# Altium PCB DoorCardController.PcbDoc (part 1 of 2)
Units mm, origin at the board's own origin, x right, y up, seen from the top; angles counter-clockwise.
Board outline 87 x 117.3 mm, 2 copper layers (Top Layer, Bottom Layer); 141 components, 112 nets, 420 pads, 246 vias.
Unrouted connection lines stored in the file: 29.
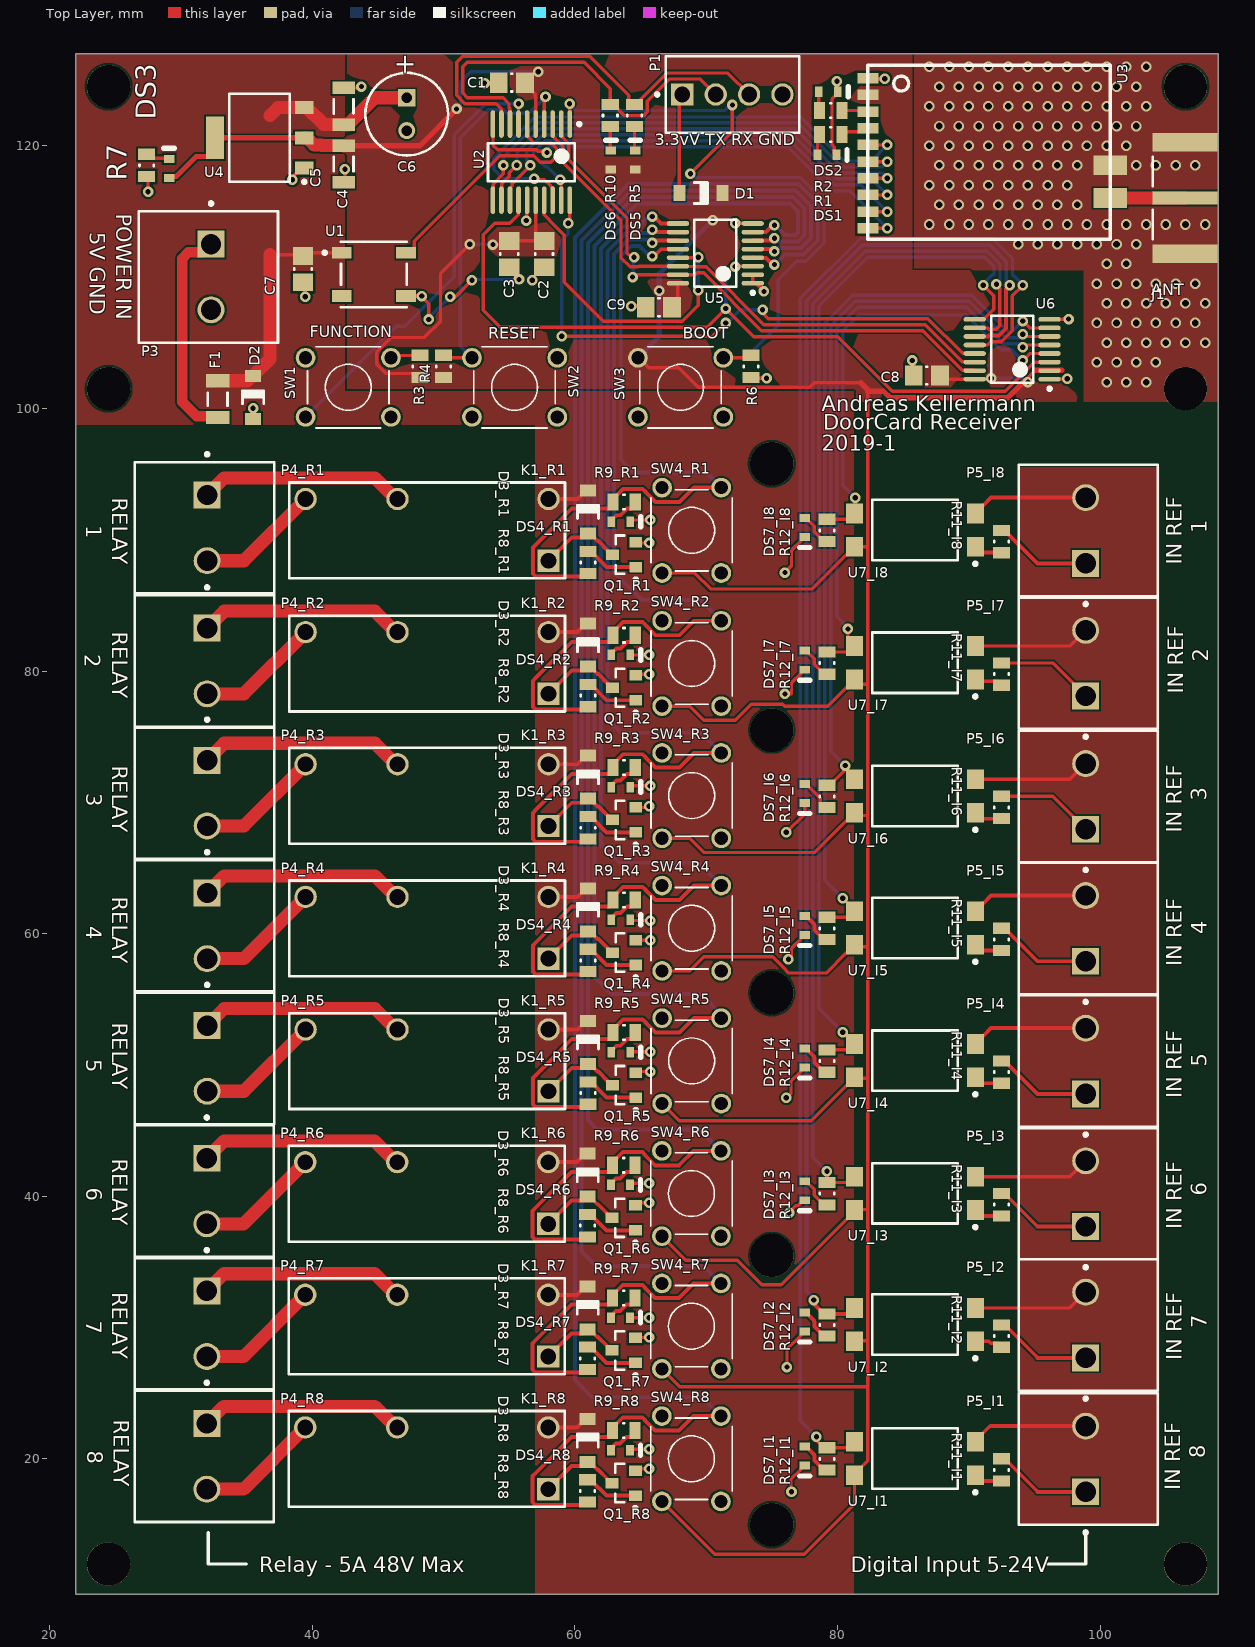
[diagram p0: Top Layer view]
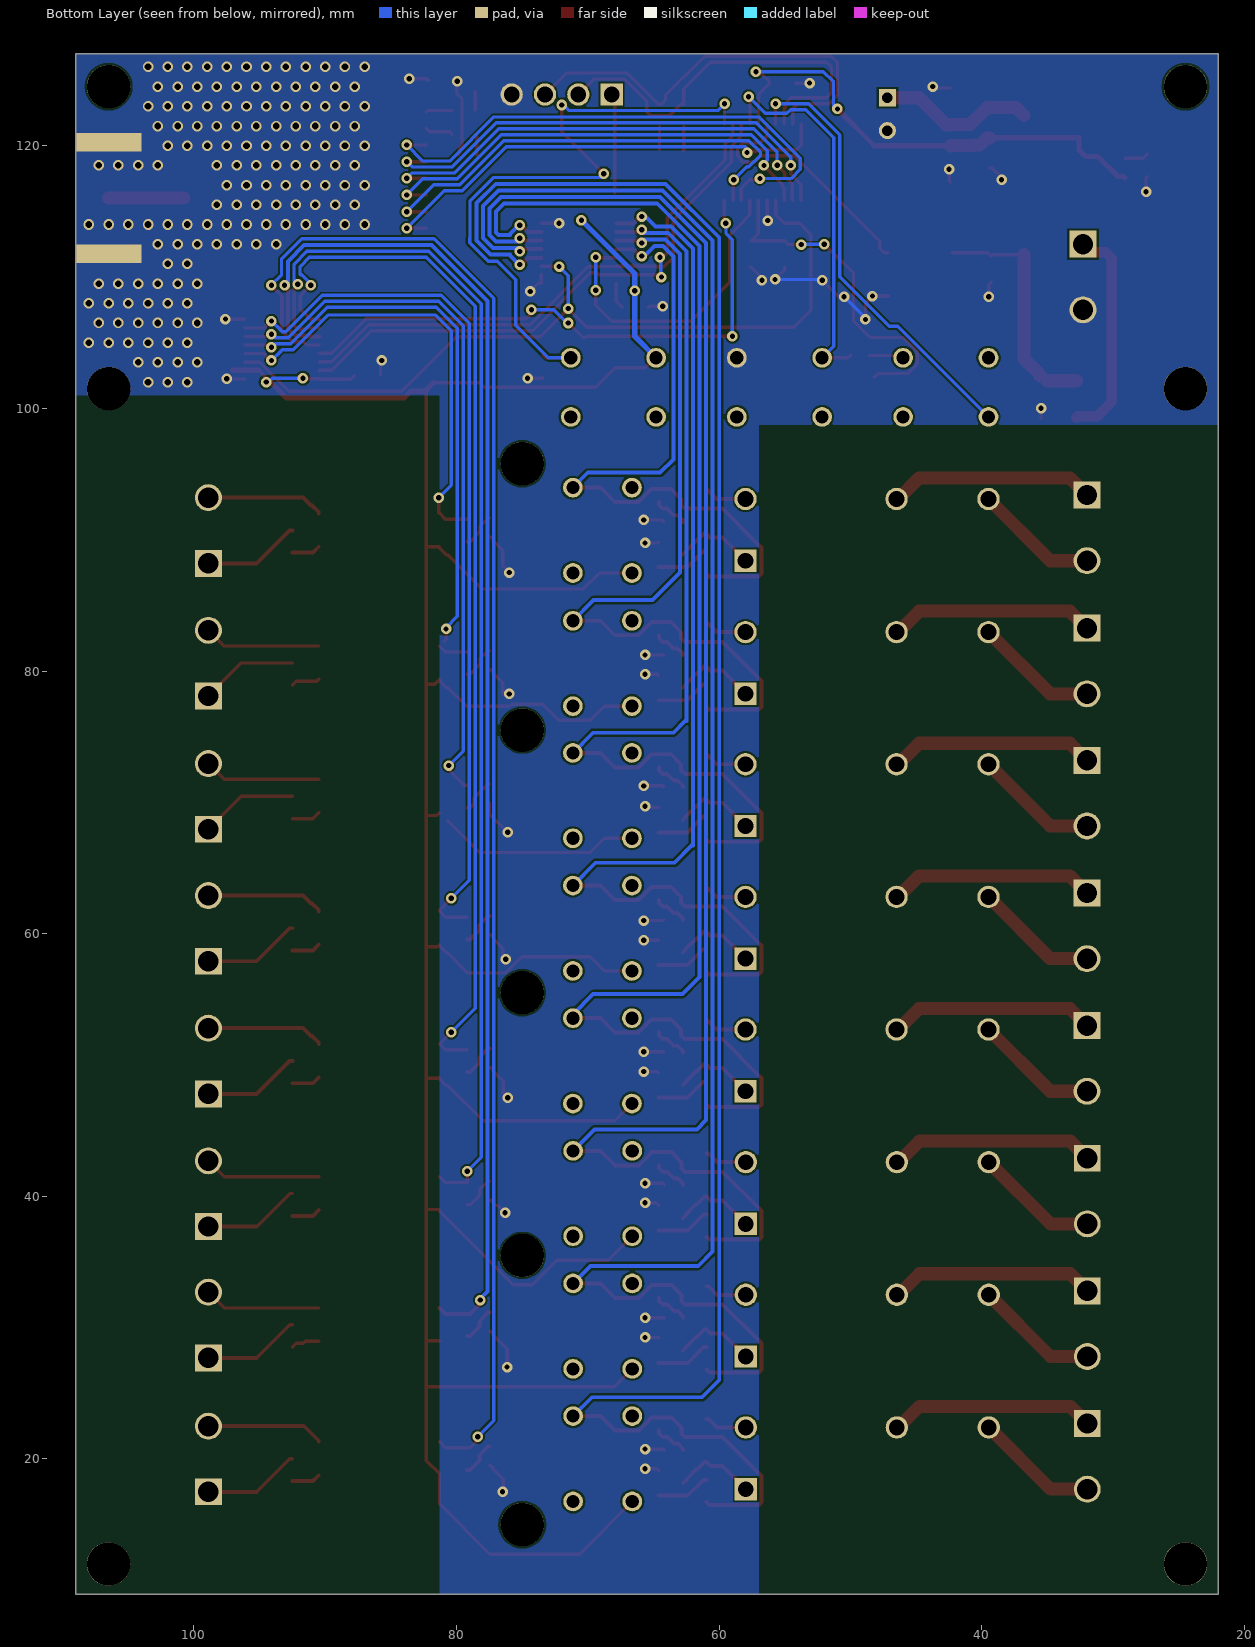
[diagram p1: Bottom Layer view, seen from below]

## Layer stack, top to bottom
Top Solder: solder mask 0.0102, Solder Resist, Dk 3.5
Top Layer: signal copper 0.0356
Dielectric 1: dielectric 0.32, FR-4, Dk 4.8
Bottom Layer: signal copper 0.0356
Bottom Solder: solder mask 0.0102, Solder Resist, Dk 3.5

## Board outline
22,9.7 109,9.7 109,127 22,127

## Design rules (kind name [scope] priority, off if disabled: settings)
Clearance [All] p1: gap=0.16 ignorepadtopadclearanceinfootprint=FALSE
PlaneConnect [All] p1: planeconnectstyle=Direct reliefexpansion=0.508 reliefentries=4 reliefconductorwidth=0.254 reliefairgap=0.254
PolygonConnect [All] p1: connectstyle=Direct reliefconductorwidth=0.254 reliefentries=4 polygonreliefangle="90 Angle" airgapwidth=0.254
RoomDefinition I8 [InComponentClass('I8')] p1: confinementstyle=ConfineIn formatcopy=TRUE lockcomponents=FALSE outline 73.9,85.66 104.4,85.66 104.4,95.86 73.9,95.86
RoomDefinition I7 [InComponentClass('I7')] p2: confinementstyle=ConfineIn formatcopy=TRUE lockcomponents=FALSE outline 73.9,75.56 104.4,75.56 104.4,85.76 73.9,85.76
RoomDefinition I6 [InComponentClass('I6')] p3: confinementstyle=ConfineIn formatcopy=TRUE lockcomponents=FALSE outline 73.9,65.41 104.4,65.41 104.4,75.61 73.9,75.61
RoomDefinition I5 [InComponentClass('I5')] p4: confinementstyle=ConfineIn formatcopy=TRUE lockcomponents=FALSE outline 73.9,55.36 104.4,55.36 104.4,65.56 73.9,65.56
RoomDefinition I4 [InComponentClass('I4')] p5: confinementstyle=ConfineIn formatcopy=TRUE lockcomponents=FALSE outline 73.9,45.26 104.4,45.26 104.4,55.46 73.9,55.46
RoomDefinition I3 [InComponentClass('I3')] p6: confinementstyle=ConfineIn formatcopy=TRUE lockcomponents=FALSE outline 73.9,35.16 104.4,35.16 104.4,45.36 73.9,45.36
RoomDefinition I1 [InComponentClass('I1')] p7: confinementstyle=ConfineIn formatcopy=TRUE lockcomponents=FALSE outline 73.9,14.96 104.4,14.96 104.4,25.16 73.9,25.16
RoomDefinition R1 [InComponentClass('R1')] p8: confinementstyle=ConfineIn formatcopy=TRUE lockcomponents=FALSE outline 26.5,85.9 72.2,85.9 72.2,95.9 26.5,95.9
RoomDefinition R8 [InComponentClass('R8')] p9: confinementstyle=ConfineIn formatcopy=TRUE lockcomponents=FALSE outline 26.477,15.2 72.177,15.2 72.177,25.2 26.477,25.2
RoomDefinition R7 [InComponentClass('R7')] p10: confinementstyle=ConfineIn formatcopy=TRUE lockcomponents=FALSE outline 26.477,25.3 72.177,25.3 72.177,35.3 26.477,35.3
RoomDefinition R6 [InComponentClass('R6')] p11: confinementstyle=ConfineIn formatcopy=TRUE lockcomponents=FALSE outline 26.477,35.4 72.177,35.4 72.177,45.4 26.477,45.4
RoomDefinition R5 [InComponentClass('R5')] p12: confinementstyle=ConfineIn formatcopy=TRUE lockcomponents=FALSE outline 26.5,45.5 72.2,45.5 72.2,55.5 26.5,55.5
RoomDefinition R4 [InComponentClass('R4')] p13: confinementstyle=ConfineIn formatcopy=TRUE lockcomponents=FALSE outline 26.5,55.6 72.2,55.6 72.2,65.6 26.5,65.6
RoomDefinition I2 [InComponentClass('I2')] p14: confinementstyle=ConfineIn formatcopy=TRUE lockcomponents=FALSE outline 73.9,25.16 104.4,25.16 104.4,35.36 73.9,35.36
RoomDefinition R3 [InComponentClass('R3')] p15: confinementstyle=ConfineIn formatcopy=TRUE lockcomponents=FALSE outline 26.5,65.7 72.2,65.7 72.2,75.7 26.5,75.7
RoomDefinition R2 [InComponentClass('R2')] p16: confinementstyle=ConfineIn formatcopy=TRUE lockcomponents=FALSE outline 26.5,75.763 72.2,75.763 72.2,85.763 26.5,85.763
RoutingVias [All] p1: holewidth=0.4 width=0.7 viastyle="Through Hole" minholewidth=0.4 minwidth=0.7 maxholewidth=1 maxwidth=2
SolderMaskExpansion [All] p1: expansion=0.102
Width [All] p1: maxlimit=10 minlimit=0.254 preferedwidth=0.254
29 further rules are at their usual default settings.

## Classes and differential pairs
component class I7: DS7_I7 P5_I7 R11_I7 R12_I7 U7_I7
component class I6: DS7_I6 P5_I6 R11_I6 R12_I6 U7_I6
component class I5: DS7_I5 P5_I5 R11_I5 R12_I5 U7_I5
component class I4: DS7_I4 P5_I4 R11_I4 R12_I4 U7_I4
component class I3: P5_I3 R11_I3 U7_I3
component class I2: DS7_I2 P5_I2 R11_I2 R12_I2 U7_I2
component class I1: DS7_I1 P5_I1 R11_I1 R12_I1 U7_I1
channel class isolatedInput: I1 I2 I3 I4 I5 I6 I7 I8
component class R8: D3_R8 DS4_R8 K1_R8 P4_R8 Q1_R8 R8_R8 R9_R8 SW4_R8
component class R7: D3_R7 DS4_R7 K1_R7 P4_R7 Q1_R7 R8_R7 R9_R7 SW4_R7
component class R6: D3_R6 DS4_R6 K1_R6 P4_R6 Q1_R6 R8_R6 R9_R6 SW4_R6
component class Designator: C4 C5 C6 D2 F1 P3 U4
component class I8: DS7_I8 P5_I8 R11_I8 R12_I8 U7_I8
channel class Relay: R1 R2 R3 R4 R5 R6 R7 R8
component class R5: D3_R5 DS4_R5 K1_R5 P4_R5 Q1_R5 R8_R5 R9_R5 SW4_R5
component class R4: D3_R4 DS4_R4 K1_R4 P4_R4 Q1_R4 R8_R4 R9_R4 SW4_R4
component class R3: D3_R3 DS4_R3 K1_R3 P4_R3 Q1_R3 R8_R3 R9_R3 SW4_R3
component class R2: D3_R2 DS4_R2 K1_R2 P4_R2 Q1_R2 R8_R2 R9_R2 SW4_R2
component class R1: D3_R1 DS4_R1 K1_R1 P4_R1 Q1_R1 R8_R1 R9_R1 SW4_R1
component class DoorCard_ReceiverController: C1 C2 C3 C7 C8 C9 D1 DS1 DS2 DS3 DS5 DS6 J1 R1 R2 R3 R4 R5 R6 R7 R10 SW1 SW2 SW3 U1 U2 U3 U5 U6

## Components (designator, comment, footprint, x,y, rotation, side; value= is the part's Value field where it differs from the comment)
C1 "1uF" CAPC0805(2012)100_M 55.2,124.8 r0 top
C2 "1uF" CAPC0805(2012)100_M 57.665,111.75 r90 top
C3 "1uF" CAPC0805(2012)100_M 55.011,111.75 r90 top
C4 "10uF" CAPC1206(3216)130_L 42.4,123 r270 top
C5 "10uF" CAPC1206(3216)130_L 42.4,118.6 r90 top
C6 "ECA-1HM470" PNSC-ECA-1HM470 47.2,122.4 r270 top
C7 "1uF" CAPC0805(2012)100_M 39.3,110.6 r90 top
C8 "1uF" CAPC0805(2012)100_M 86.8,102.5 r0 top
C9 "1uF" CAPC0805(2012)100_M 66.4,107.7 r0 top
D1 "MMSD4148T3G" ONSC-SOD123-2-425G-04_V 69.6,116.4 r180 top
D2 "MMSD4148T3G" ONSC-SOD123-2-425G-04_V 35.5,100.837 r270 top
D3_R1 "MMSD4148T3G" ONSC-SOD123-2-425G-04_V 61,92.113 r270 top (schematic designator D3)
D3_R2 "MMSD4148T3G" ONSC-SOD123-2-425G-04_V 61,81.975 r270 top (schematic designator D3)
D3_R3 "MMSD4148T3G" ONSC-SOD123-2-425G-04_V 61,71.913 r270 top (schematic designator D3)
D3_R4 "MMSD4148T3G" ONSC-SOD123-2-425G-04_V 61,61.813 r270 top (schematic designator D3)
D3_R5 "MMSD4148T3G" ONSC-SOD123-2-425G-04_V 61,51.713 r270 top (schematic designator D3)
D3_R6 "MMSD4148T3G" ONSC-SOD123-2-425G-04_V 60.977,41.612 r270 top (schematic designator D3)
D3_R7 "MMSD4148T3G" ONSC-SOD123-2-425G-04_V 60.977,31.512 r270 top (schematic designator D3)
D3_R8 "MMSD4148T3G" ONSC-SOD123-2-425G-04_V 60.977,21.412 r270 top (schematic designator D3)
DS1 "TLMS1100-GS08" VISH-TLMX1100_V 79.2,119.3 r0 top
DS2 "TLMS1100-GS08" VISH-TLMX1100_V 79.3,124.1 r0 top
DS3 "TLMS1100-GS08" VISH-TLMX1100_V 29.1,118.275 r90 top
DS4_R1 "TLMS1100-GS08" VISH-TLMX1100_V 63.5,91.362 r0 top (schematic designator DS4)
DS4_R2 "TLMS1100-GS08" VISH-TLMX1100_V 63.5,81.225 r0 top (schematic designator DS4)
DS4_R3 "TLMS1100-GS08" VISH-TLMX1100_V 63.5,71.162 r0 top (schematic designator DS4)
DS4_R4 "TLMS1100-GS08" VISH-TLMX1100_V 63.5,61.062 r0 top (schematic designator DS4)
DS4_R5 "TLMS1100-GS08" VISH-TLMX1100_V 63.5,50.962 r0 top (schematic designator DS4)
DS4_R6 "TLMS1100-GS08" VISH-TLMX1100_V 63.477,40.862 r0 top (schematic designator DS4)
DS4_R7 "TLMS1100-GS08" VISH-TLMX1100_V 63.477,30.762 r0 top (schematic designator DS4)
DS4_R8 "TLMS1100-GS08" VISH-TLMX1100_V 63.477,20.662 r0 top (schematic designator DS4)
DS5 "TLMS1100-GS08" VISH-TLMX1100_V 64.6,118.9 r90 top
DS6 "TLMS1100-GS08" VISH-TLMX1100_V 62.75,118.9 r90 top
DS7_I1 "TLMS1100-GS08" VISH-TLMX1100_V 77.5,20.225 r270 top (schematic designator DS7)
DS7_I2 "TLMS1100-GS08" VISH-TLMX1100_V 77.5,30.425 r270 top (schematic designator DS7)
DS7_I3 "TLMS1100-GS08" VISH-TLMX1100_V 77.5,40.425 r270 top (schematic designator DS7)
DS7_I4 "TLMS1100-GS08" VISH-TLMX1100_V 77.5,50.525 r270 top (schematic designator DS7)
DS7_I5 "TLMS1100-GS08" VISH-TLMX1100_V 77.5,60.625 r270 top (schematic designator DS7)
DS7_I6 "TLMS1100-GS08" VISH-TLMX1100_V 77.5,70.675 r270 top (schematic designator DS7)
DS7_I7 "TLMS1100-GS08" VISH-TLMX1100_V 77.5,80.825 r270 top (schematic designator DS7)
DS7_I8 "TLMS1100-GS08" VISH-TLMX1100_V 77.5,90.925 r270 top (schematic designator DS7)
F1 "1206L012WR" LFUS-1206L012WR_V 32.8,100.7 r270 top
J1 "32K145-400L5" ROS-32K145-400L5_V 109,116.017 r270 top
K1_R1 "ALDP105W" PNSC-LD-P-4-2050x720x1530_V 58,88.4 r180 top (schematic designator K1)
K1_R2 "ALDP105W" PNSC-LD-P-4-2050x720x1530_V 58,78.263 r180 top (schematic designator K1)
K1_R3 "ALDP105W" PNSC-LD-P-4-2050x720x1530_V 58,68.2 r180 top (schematic designator K1)
K1_R4 "ALDP105W" PNSC-LD-P-4-2050x720x1530_V 58,58.1 r180 top (schematic designator K1)
K1_R5 "ALDP105W" PNSC-LD-P-4-2050x720x1530_V 58,48 r180 top (schematic designator K1)
K1_R6 "ALDP105W" PNSC-LD-P-4-2050x720x1530_V 57.977,37.9 r180 top (schematic designator K1)
K1_R7 "ALDP105W" PNSC-LD-P-4-2050x720x1530_V 57.977,27.8 r180 top (schematic designator K1)
K1_R8 "ALDP105W" PNSC-LD-P-4-2050x720x1530_V 57.977,17.7 r180 top (schematic designator K1)
P1 "22-27-2041" MOLX-22-27-2041_V 72,123.9 r180 top
P3 "SCREW-5.0/5.08 2WAYS" SCREW-5.0-2WAYS_V 32.3,110 r270 top
P4_R1 "SCREW-5.0/5.08 2WAYS" SCREW-5.0-2WAYS_V 32,90.9 r270 top (schematic designator P4)
P4_R2 "SCREW-5.0/5.08 2WAYS" SCREW-5.0-2WAYS_V 32,80.763 r270 top (schematic designator P4)
P4_R3 "SCREW-5.0/5.08 2WAYS" SCREW-5.0-2WAYS_V 32,70.7 r270 top (schematic designator P4)
P4_R4 "SCREW-5.0/5.08 2WAYS" SCREW-5.0-2WAYS_V 32,60.6 r270 top (schematic designator P4)
P4_R5 "SCREW-5.0/5.08 2WAYS" SCREW-5.0-2WAYS_V 32,50.5 r270 top (schematic designator P4)
P4_R6 "SCREW-5.0/5.08 2WAYS" SCREW-5.0-2WAYS_V 31.977,40.4 r270 top (schematic designator P4)
P4_R7 "SCREW-5.0/5.08 2WAYS" SCREW-5.0-2WAYS_V 31.977,30.3 r270 top (schematic designator P4)
P4_R8 "SCREW-5.0/5.08 2WAYS" SCREW-5.0-2WAYS_V 31.977,20.2 r270 top (schematic designator P4)
P5_I1 "SCREW-5.0/5.08 2WAYS" SCREW-5.0-2WAYS_V 98.9,20 r90 top (schematic designator P5)
P5_I2 "SCREW-5.0/5.08 2WAYS" SCREW-5.0-2WAYS_V 98.9,30.2 r90 top (schematic designator P5)
P5_I3 "SCREW-5.0/5.08 2WAYS" SCREW-5.0-2WAYS_V 98.9,40.2 r90 top (schematic designator P5)
P5_I4 "SCREW-5.0/5.08 2WAYS" SCREW-5.0-2WAYS_V 98.9,50.3 r90 top (schematic designator P5)
P5_I5 "SCREW-5.0/5.08 2WAYS" SCREW-5.0-2WAYS_V 98.9,60.4 r90 top (schematic designator P5)
P5_I6 "SCREW-5.0/5.08 2WAYS" SCREW-5.0-2WAYS_V 98.9,70.45 r90 top (schematic designator P5)
P5_I7 "SCREW-5.0/5.08 2WAYS" SCREW-5.0-2WAYS_V 98.9,80.6 r90 top (schematic designator P5)
P5_I8 "SCREW-5.0/5.08 2WAYS" SCREW-5.0-2WAYS_V 98.9,90.7 r90 top (schematic designator P5)
Q1_R1 "A12" INTR-SOT-23-3_V 63.75,88.862 r90 top (schematic designator Q1)
Q1_R2 "A12" INTR-SOT-23-3_V 63.75,78.725 r90 top (schematic designator Q1)
Q1_R3 "A12" INTR-SOT-23-3_V 63.75,68.663 r90 top (schematic designator Q1)
Q1_R4 "A12" INTR-SOT-23-3_V 63.75,58.562 r90 top (schematic designator Q1)
Q1_R5 "A12" INTR-SOT-23-3_V 63.75,48.462 r90 top (schematic designator Q1)
Q1_R6 "A12" INTR-SOT-23-3_V 63.727,38.363 r90 top (schematic designator Q1)
Q1_R7 "A12" INTR-SOT-23-3_V 63.727,28.263 r90 top (schematic designator Q1)
Q1_R8 "A12" INTR-SOT-23-3_V 63.727,18.162 r90 top (schematic designator Q1)
R1 "330" RESC0805(2012)_L 79.488,120.85 r180 top value="10200.00 Ohm"
R2 "330" RESC0805(2012)_L 79.488,122.675 r180 top value="10200.00 Ohm"
R3 "10k" RESC0805(2012)_L 48.2,103.2 r270 top value="10200.00 Ohm"
R4 "10k" RESC0805(2012)_L 50,103.2 r270 top value="10200.00 Ohm"
R5 "330" RESC0805(2012)_L 64.55,122.3 r270 top value="10200.00 Ohm"
R6 "10k" RESC0805(2012)_L 73.417,103.2 r90 top value="10200.00 Ohm"
R7 "10k" RESC0805(2012)_L 27.4,118.5 r90 top value="10200.00 Ohm"
R8_R1 "10k" RESC0805(2012)_L 61,88.263 r270 top value="10200.00 Ohm" (schematic designator R8)
R8_R2 "10k" RESC0805(2012)_L 61,78.125 r270 top value="10200.00 Ohm" (schematic designator R8)
R8_R3 "10k" RESC0805(2012)_L 61,68.063 r270 top value="10200.00 Ohm" (schematic designator R8)
R8_R4 "10k" RESC0805(2012)_L 61,57.963 r270 top value="10200.00 Ohm" (schematic designator R8)
R8_R5 "10k" RESC0805(2012)_L 61,47.863 r270 top value="10200.00 Ohm" (schematic designator R8)
R8_R6 "10k" RESC0805(2012)_L 60.977,37.763 r270 top value="10200.00 Ohm" (schematic designator R8)
R8_R7 "10k" RESC0805(2012)_L 60.977,27.663 r270 top value="10200.00 Ohm" (schematic designator R8)
R8_R8 "10k" RESC0805(2012)_L 60.977,17.563 r270 top value="10200.00 Ohm" (schematic designator R8)
R9_R1 "330" RESC0805(2012)_L 63.75,92.863 r0 top value="10200.00 Ohm" (schematic designator R9)
R9_R2 "330" RESC0805(2012)_L 63.75,82.725 r0 top value="10200.00 Ohm" (schematic designator R9)
R9_R3 "330" RESC0805(2012)_L 63.75,72.663 r0 top value="10200.00 Ohm" (schematic designator R9)
R9_R4 "330" RESC0805(2012)_L 63.75,62.563 r0 top value="10200.00 Ohm" (schematic designator R9)
R9_R5 "330" RESC0805(2012)_L 63.75,52.463 r0 top value="10200.00 Ohm" (schematic designator R9)
R9_R6 "330" RESC0805(2012)_L 63.727,42.363 r0 top value="10200.00 Ohm" (schematic designator R9)
R9_R7 "330" RESC0805(2012)_L 63.727,32.263 r0 top value="10200.00 Ohm" (schematic designator R9)
R9_R8 "330" RESC0805(2012)_L 63.727,22.163 r0 top value="10200.00 Ohm" (schematic designator R9)
R10 "330" RESC0805(2012)_L 62.7,122.3 r270 top value="10200.00 Ohm"
R11_I1 "2k" RESC0805(2012)_L 92.5,19.16 r270 top value="10200.00 Ohm" (schematic designator R11)
R11_I2 "2k" RESC0805(2012)_L 92.5,29.36 r270 top value="10200.00 Ohm" (schematic designator R11)
R11_I3 "2k" RESC0805(2012)_L 92.5,39.36 r270 top value="10200.00 Ohm" (schematic designator R11)
R11_I4 "2k" RESC0805(2012)_L 92.5,49.46 r270 top value="10200.00 Ohm" (schematic designator R11)
R11_I5 "2k" RESC0805(2012)_L 92.5,59.56 r270 top value="10200.00 Ohm" (schematic designator R11)
R11_I6 "2k" RESC0805(2012)_L 92.5,69.61 r270 top value="10200.00 Ohm" (schematic designator R11)
R11_I7 "2k" RESC0805(2012)_L 92.5,79.76 r270 top value="10200.00 Ohm" (schematic designator R11)
R11_I8 "2k" RESC0805(2012)_L 92.5,89.86 r270 top value="10200.00 Ohm" (schematic designator R11)
R12_I1 "2k" RESC0805(2012)_L 79.2,20 r270 top value="10200.00 Ohm" (schematic designator R12)
R12_I2 "2k" RESC0805(2012)_L 79.2,30.2 r270 top value="10200.00 Ohm" (schematic designator R12)
R12_I3 "2k" RESC0805(2012)_L 79.2,40.2 r270 top value="10200.00 Ohm" (schematic designator R12)
R12_I4 "2k" RESC0805(2012)_L 79.2,50.3 r270 top value="10200.00 Ohm" (schematic designator R12)
R12_I5 "2k" RESC0805(2012)_L 79.2,60.4 r270 top value="10200.00 Ohm" (schematic designator R12)
R12_I6 "2k" RESC0805(2012)_L 79.2,70.45 r270 top value="10200.00 Ohm" (schematic designator R12)
R12_I7 "2k" RESC0805(2012)_L 79.2,80.6 r270 top value="10200.00 Ohm" (schematic designator R12)
R12_I8 "2k" RESC0805(2012)_L 79.2,90.7 r270 top value="10200.00 Ohm" (schematic designator R12)
SW1 "430156070736" 430156070736 42.75,101.6 r0 top locked
SW2 "430156070736" 430156070736 55.415,101.6 r0 top locked
SW3 "430156070736" 430156070736 68.055,101.6 r0 top locked
SW4_R1 "430156070736" 430156070736 68.9,90.713 r90 top (schematic designator SW4)
SW4_R2 "430156070736" 430156070736 68.9,80.575 r90 top (schematic designator SW4)
SW4_R3 "430156070736" 430156070736 68.9,70.513 r90 top (schematic designator SW4)
SW4_R4 "430156070736" 430156070736 68.9,60.413 r90 top (schematic designator SW4)
SW4_R5 "430156070736" 430156070736 68.9,50.313 r90 top (schematic designator SW4)
SW4_R6 "430156070736" 430156070736 68.877,40.213 r90 top (schematic designator SW4)
SW4_R7 "430156070736" 430156070736 68.877,30.113 r90 top (schematic designator SW4)
SW4_R8 "430156070736" 430156070736 68.877,20.012 r90 top (schematic designator SW4)
U1 "WS2812B" ADAI-WS2812B_V 44.7,110.2 r0 top
U2 "STM32F070F6P6" STM-TSSOP20_M 56.69,118.75 r270 top locked
U3 "Si4463" E10-433MS 82.312,113.707 r0 top
U4 "LT1117CST-3.3#TRPBF" LT-ST-3-SOT-223_N 36,120.6 r180 top
U5 "PCA9538PW" PW16_N 70.7,111.8 r180 top
U6 "PCA9538PW" PW16_N 93.3,104.5 r180 top
U7_I1 "FOD817DSD" FAIR-MDIP-4_V 85.9,20.03 r180 top (schematic designator U7)
U7_I2 "FOD817DSD" FAIR-MDIP-4_V 85.9,30.23 r180 top (schematic designator U7)
U7_I3 "FOD817DSD" FAIR-MDIP-4_V 85.9,40.23 r180 top (schematic designator U7)
U7_I4 "FOD817DSD" FAIR-MDIP-4_V 85.9,50.33 r180 top (schematic designator U7)
U7_I5 "FOD817DSD" FAIR-MDIP-4_V 85.9,60.43 r180 top (schematic designator U7)
U7_I6 "FOD817DSD" FAIR-MDIP-4_V 85.9,70.48 r180 top (schematic designator U7)
U7_I7 "FOD817DSD" FAIR-MDIP-4_V 85.9,80.63 r180 top (schematic designator U7)
U7_I8 "FOD817DSD" FAIR-MDIP-4_V 85.9,90.73 r180 top (schematic designator U7)

## Footprints (in the part's own frame and the unit in brackets; to place one, negate y for a bottom-side part, rotate by r counter-clockwise, add the part's x,y. Pads: shape width x height; smd on the part's side, far side on the other; paste and mask are expansions set on the pad)
430156070736 [mm] "6*6mm vertical type, THT, height 7.0mm, salmon actuator, 360gf, Bulk"
  round 1.5 hole 1: 1(-3.25,2.25) 2(-3.25,-2.25) 3(3.25,2.25) 4(3.25,-2.25)
  silkscreen extent -3.1,-3.1 3.1,3.1, body extent -3.95,-3.1 3.95,3.1, height 7.01
ADAI-WS2812B_V [mm] "SMD, 4-Leads, Body 5x5mm, Pitch 3.3mm"
  rect 1.5x0.9 smd: 1(-2.45,1.65) 2(-2.45,-1.65) 3(2.45,-1.65) 4(2.45,1.65)
  silkscreen extent -3.87,-2.5 2.5,2.5, body extent -2.7,-2.5 2.7,2.5, height 1.69
CAPC0805(2012)100_M [mm] "Chip Capacitor, Body 2.0x1.2mm, Height 1.0mm, IPC Low Density"
  rect 1.35x1.55 smd: 1(-1,0) 2(1,0)
  silkscreen extent -0.05,-0.67 0.05,0.67, body extent -1.1,-0.72 1.1,0.72, height 1
CAPC1206(3216)130_L [mm] "Chip Capacitor, Body 3.2x1.6mm, Height 1.3mm, IPC High Density"
  rect 0.95x1.7 smd: 1(-1.4,0) 2(1.4,0)
  silkscreen extent -0.55,-0.75 0.55,0.75, body extent -1.7,-0.9 1.7,0.9, height 1.3
E10-433MS [mm] "Si4463"
  rect 1.6x0.8 smd: 1(0,11.43) 2(0,10.16) 3(0,8.89) 4(0,7.62) 5(0,6.35) 6(0,5.08) 7(0,3.81) 8(0,2.54) 9(0,1.27) 10(0,0)
  rect 2.54x1.5 smd: 11(18.45,2.31) 12(18.45,4.8)
  silkscreen extent 0,-0.84 18.45,12.43
FAIR-MDIP-4_V [mm] "SMD, 4-Leads, Body 6.5x4.6mm, Pitch 2.54mm"
  rect 1.3x1.5 smd: 1(-4.6,1.27) 2(-4.6,-1.27) 3(4.6,-1.27) 4(4.6,1.27)
  silkscreen extent -4.73,-2.3 3.25,2.69, body extent -5.08,-2.3 5.08,2.3, height 3.85
INTR-SOT-23-3_V [mm] "SOT23, 3-Leads, Body 2.92x1.3mm, Pitch 1.9mm"
  rect 0.802x0.972 smd: 1(-0.95,-0.885) 2(0.95,-0.885) 3(0,0.885)
  silkscreen extent -2.03,-1.01 1.46,0.64, body extent -1.46,-0.65 1.46,0.65, height 1.12
LFUS-1206L012WR_V [mm] "SMD, 2-Leads, Body 3.2x1.65mm"
  rect 1x1.8 smd: 1(-1.4,0) 2(1.4,0)
  silkscreen extent -0.5,-0.75 0.5,0.75, body extent -1.6,-0.82 1.6,0.82, height 1.45
LT-ST-3-SOT-223_N [mm] "SOT223, 4-Leads, Body 6.505x3.505mm, Pitch 2.3mm, IPC Medium Density"
  rect 1.4x1 smd: 1(-3.4,2.3) 2(-3.4,0) 3(-3.4,-2.3)
  rect 1.4x3.25 smd: 4(3.4,0)
  silkscreen extent -3.53,-3.35 2.3,3.47, body extent -1.86,-3.35 1.86,3.35, height 1.8
MOLX-22-27-2041_V [mm] "CONN, 4-Leads, Body 10.16x5.8mm, Pitch 2.54mm"
  rect 1.7x1.7 hole 1.19: 1(3.81,0)
  round 1.7 hole 1.19: 2(1.27,0) 3(-1.27,0) 4(-3.81,0)
  silkscreen extent -5.08,-2.9 5.85,2.9, body extent -5.08,-2.9 5.08,2.9, height 11.7
ONSC-SOD123-2-425G-04_V [mm] "SOD123, 2-Leads, Body 2.69x1.6mm, Height 1.35mm"
  rect 0.915x1.22 smd: 1(-1.637,0) 2(1.637,0)
  silkscreen extent -0.5,-0.8 0.5,0.8, body extent -1.35,-0.8 1.35,0.8, height 1.35
PNSC-ECA-1HM470 [mm]
  rect 1.3x1.3 hole 0.8: 1(-1.25,0)
  round 1.3 hole 0.8: 2(1.25,0)
  silkscreen extent -3.15,-3.15 3.15,3.15, body extent -3.15,-3.15 3.15,3.15, height 12.2
PNSC-LD-P-4-2050x720x1530_V [mm] "LD-P, 4-Leads, Body 20.5x7.2mm"
  rect 1.7x1.7 hole 1.2 mask+0.102: 1(0,0)
  round 1.7 hole 1.2 mask+0.102: 2(18.5,-4.7) 3(11.5,-4.7) 4(0,-4.7)
  silkscreen extent -1.25,-5.95 19.75,1.35, body extent -1.05,-5.85 19.45,1.35, height 15.3
PW16_N [mm] "TSOP, 16-Leads, Body 5x4.4mm, Pitch 0.65mm, IPC Medium Density"
  oval 1.7x0.35 smd: 1(-2.85,2.275) 2(-2.85,1.625) 3(-2.85,0.975) 4(-2.85,0.325) 5(-2.85,-0.325) 6(-2.85,-0.975) 7(-2.85,-1.625) 8(-2.85,-2.275) 9(2.85,-2.275) 10(2.85,-1.625) 11(2.85,-0.975) 12(2.85,-0.325) 13(2.85,0.325) 14(2.85,0.975) 15(2.85,1.625) 16(2.85,2.275)
  silkscreen extent -2.98,-2.55 1.6,3.12, body extent -2.25,-2.55 2.25,2.55, height 1.2
RESC0805(2012)_L [mm] "Chip Resistor, Body 2.0x1.3mm, IPC High Density"
  rect 0.85x1.3 smd: 1(-0.85,0) 2(0.85,0)
  silkscreen extent -0.05,-0.55 0.05,0.55, body extent -1.1,-0.67 1.1,0.68, height 0.7
ROS-32K145-400L5_V [mm] "SMA Right Angle Jack, Edge Mount, 14.25x9.5x4.46mm, Rosenberger Recommended"
  rect 1x5 smd: 1(0,-2.5)
  rect 1.4x5 smd: MP(-4.25,-2.5) MP(4.25,-2.5)
  rect 1.4x5 smd far side paste-2: MP(-4.25,-2.5) MP(4.25,-2.5)
  silkscreen extent -3.15,-5 3.15,-5, body extent -4.75,-4.75 4.75,9.5, height 4.2
SCREW-5.0-2WAYS_V [mm] "Socket, Screw Terminal Block, 2-Leads, Pitch 5mm, 90 Degree Angle, Through-Hole"
  rect 2.05x2.05 hole 1.55: 1(-2.5,0)
  round 2.05 hole 1.55: 2(2.5,0)
  silkscreen extent -5.72,-5.5 5,5.1, body extent -5,-5.5 5.02,5.1, height 18.2
STM-TSSOP20_M [mm] "SOP, 20-Leads, Body 6.6x4.5mm, Pitch 0.65mm, IPC Low Density"
  oval 2.1x0.35 smd: 1(-2.9,2.925) 2(-2.9,2.275) 3(-2.9,1.625) 4(-2.9,0.975) 5(-2.9,0.325) 6(-2.9,-0.325) 7(-2.9,-0.975) 8(-2.9,-1.625) 9(-2.9,-2.275) 10(-2.9,-2.925) 11(2.9,-2.925) 12(2.9,-2.275) 13(2.9,-1.625) 14(2.9,-0.975) 15(2.9,-0.325) 16(2.9,0.325) 17(2.9,0.975) 18(2.9,1.625) 19(2.9,2.275) 20(2.9,2.925)
  silkscreen extent -3.02,-3.3 1.45,3.78, body extent -2.25,-3.3 2.25,3.3, height 1.2
VISH-TLMX1100_V [mm] "SMD, 2-Leads, Body 1.6x0.8mm"
  rect 0.6x0.8 smd: 1(-0.725,0) 2(0.725,0)
  silkscreen extent 1.53,-0.4 1.53,0.4, body extent -0.8,-0.4 0.8,0.4, height 0.65

## Part data
C1 C2 C3 C7 C8 C9: library part CMP-1036-04754-1, "CAP 1uF 25V ±10% 0805 (2012 Metric) Thickness 1mm SMD", Case-EIA=0805, Case-Metric=2012, Rated Voltage="25 V", Tolerance=±10%, Max Thickness="1 mm", Technology=SMT
C4 C5: library part CMP-1037-04970-1, Case-EIA=1206, Case-Metric=3216, Rated Voltage="10 V", Tolerance="-20% to +80%", Max Thickness="1.3 mm", Technology=SMT
C6: library part CMP-1665-00013-1, "CAP ALUM 47UF 50V 20% RADIAL", ComponentLink1Description=Datasheet, ComponentLink1URL=http://industrial.panasonic.com/cdbs/www-data/pdf/RDF0000/ABA0000C1047.pdf, PackageReference=ECA-1HM470, PartNumber=ECA-1HM470
D1 D2 D3_R1 D3_R2 D3_R3 D3_R4 D3_R5 D3_R6 D3_R7 D3_R8: library part CMP-0895-00002-1, "Switching Diode, 100 V, 200 mA, -55 to 150 degC, 2-Pin SOD123 (425), RoHS, Tape and Reel", Manufacturer="ON Semiconductor", Temperature Range="-55 to 150 degC", CD (Max)="4 pF", ComponentLink1Description="Manufacturer URL", ComponentLink1URL=http://www.onsemi.com/, ComponentLink2Description=Datasheet, ComponentLink2URL=http://www.onsemi.com/pub_link/Collateral/MMSD4148T1-D.PDF, ComponentLink3Description="Package Specification", ComponentLink3URL=http://www.onsemi.com/pub_link/Collateral/425-04.PDF, DatasheetVersion="Rev. 11", IR @ VR="75 V (Max)=50 uA", Mounting Technology="Surface Mount", PackageDescription="2-Pin SOD123, Body 2.69 x 1.6 mm, Height 1.35 mm", PackageReference=SOD123-2-425G-04, PackageVersion="Rev. 04G", Packing="Tape and Reel", PartNumber=MMSD4148T3G, PD (Max)="425 mW", RoHS=TRUE, Trr (Max)="4 ns", VBR (Min)="100 V", VF (Max)="1 A"
DS1 DS2 DS3 DS4_R1 DS4_R2 DS4_R3 DS4_R4 DS4_R5 DS4_R6 DS4_R7 DS4_R8 DS5 DS6 DS7_I1 DS7_I2 DS7_I3 DS7_I4 DS7_I5 DS7_I6 DS7_I7 DS7_I8: library part CMP-1666-00027-1, "LED, RED, 2.1 V, -40 to 100 degC, 2-Pin SMD (0603), RoHS, Tape and Reel", Capacitance="12 pF", Case/Package=0603, Case Code (Metric)=1608, Max Operating Temperature=125degC, Min Operating Temperature=-55degC, Package Quantity=4000, Resistance="100000000000 Ohm", Tolerance=5%, Type (Capacitors)=C0G, Voltage Rating="50 V", Case Code (Imperial)=0603, ComponentLink1Description="Manufacturer URL", ComponentLink1URL=http://www.vishay.com/, ComponentLink2Description=Datasheet, ComponentLink2URL=http://www.vishay.com/docs/83173/tlmb1100.pdf, DatasheetVersion="Rev. 2.7, 03/2016", Height="0.8 mm", Length="1.6 mm", Mount="Surface Mount", PackageDescription="2-Pin Surface Mount Device, Body 1.6 x 0.8 mm", PackageReference=TLMX1100, Packaging="Tape and Reel", Pins=2, Radiation Hardening=No, REACH SVHC="No SVHC", RoHSCompliant=True, Voltage Rating (DC)="50 V", Width="0.8 mm"
F1: library part CMP-2000-05470-1, "POLY-FUSE(R) Resettable PTC, 30 V, -40 to 85 degC, 2-Pin SMD, RoHS, Tape and Reel", Hold Current [Ih]=0.125A, Manufacturer=Littelfuse, Operating Temp Range=-40to+85°C, Package Description="2-Pin Surface Mount Device, Body 3.2 x 1.65 mm", Package Reference=1206, Trip Current=0.29A, Working Voltage-Max=30V, Datasheet URL=https://datasheet.ciiva.com/26787/1206l012wr-26787215.pdf, Datasheet Version=04/2012, Manufacturer URL=http://www.littelfuse.com/, Mounting Technology=SurfaceMount, Size=1206
J1: library part CMP-0751-00004-2, "SMA Right Angle Jack, Edge Mount, Up to 18 GHz, -55 to 155 degC", Manufacturer=Rosenberger, ComponentLink1Description="Manufacturer URL", ComponentLink1URL=http://www.rosenberger.de, ComponentLink2Description=Datasheet, ComponentLink2URL=http://rosenberger.de/ok/images/documents/db/32K145-400L5.pdf, ComponentLink3Description="Package Specification", ComponentLink3URL=http://rosenberger.de/ok/images/documents/db/32K145-400L5.pdf, ComponentLink4Description="Series Overview / Design Note", ComponentLink4URL=http://rosenberger.de/ok/images/documents/spez/32.pdf, ComponentLink5Description="Webshop / RFQ", ComponentLink5URL=http://www.rosenberger.com/en/contact/sales/, DatasheetVersion=b00, Desgin Note 2="For more information about DRC setting, please look at following webpage, http://techdocs.altium.com/display/SCRT/Design+Rule+for+Edge-Mount+Connectors", Design Note 1="Footprint in library is a generic example - only application specific footprint delivers High Performance", Mounting Technology="Surface Mount", PackageDescription="SMA Right Angle Jack, Edge Mount, 14.25 x 9.5 x 4.46 mm", PackageReference=32K145-400L5, PackageVersion=b00, PartNumber=32K145-400L5
K1_R1 K1_R2 K1_R3 K1_R4 K1_R5 K1_R6 K1_R7 K1_R8: library part CMP-1503-00163-1, "LD-P Relays, 5 V Coil Voltage, 200 mW Nominal Operating Power, -40 to 85 degC, 4-Pin LD-P, Carton, Case, RoHS", Coil Voltage="5 V", Manufacturer=Panasonic, Max Switching Current="5 A AC, 3 A DC", Max Switching Voltage="277 V AC, 30 V DC", Nominal Operating Power="200 mW", ComponentLink1Description="Manufacturer URL", ComponentLink1URL=http://www3.panasonic.biz/ac/ae/index.jsp, ComponentLink2Description=Datasheet, ComponentLink2URL=http://www3.panasonic.biz/ac/e_download/control/relay/power/catalog/mech_eng_ldp.pdf?f_cd=300242, ComponentLink3Description="Package Specification", ComponentLink3URL=http://www3.panasonic.biz/ac/e_download/control/relay/power/catalog/mech_eng_ldp.pdf?f_cd=300242, DatasheetVersion=201402-T, Electrical Life=2x10^5, Mechanical Life(Min.operation)=5x10^6, Mounting Technology="Through Hole", PackageDescription="4-Pin Through Hole Terminal Package, Body 20.5 x 7.2 mm", PackageReference=LD-P-4-2050x720x1530, PackageVersion="ASCTB193E, 02/2014", Packing="Carton, Case", PartNumber=ALDP105W, Pb-Free=True, RoHS=True, Series="LD-P Relays"
P1: library part CMP-2000-05243-1, "Male Header, Pitch 2.54 mm, 1 x 4 Position, Height 11.7 mm, Tail Length 3.56 mm, RoHS, Bulk", Current Rating=4A, Manufacturer=Molex, Operating Temperature=0degCto+75degC, Voltage Rating=250V, Contact Material=Tinplatedbrass, Datasheet URL=http://www.molex.com/pdm_docs/sd/022272041_sd.pdf, Datasheet Version="Rev. F, 06/2009", Housing Material=Nylon(UL94V-0), Manufacturer URL=http://www.molex.com/
P3 P4_R1 P4_R2 P4_R3 P4_R4 P4_R5 P4_R6 P4_R7 P4_R8 P5_I1 P5_I2 P5_I3 P5_I4 P5_I5 P5_I6 P5_I7 P5_I8: library part CMP-0617-00009-1, "Socket, Screw Terminal Block, 2 Way, 5.0 mm Pitch, 90 Degree Angle, Through-Hole", Contact Resistance="20 mOhm", Insulation Resistance="5000 MOhm / 1000 V", Manufacturer="No Vendor", Rated Current="25 A", Rated Voltage="300 V", Temperature Range="-40 to 105 degC", ComponentLink1Description=Datasheet, ComponentLink1URL="5mm screw terminal in SVN", Mounting Technology="Through Hole", PackageDescription="Socket, Screw Terminal Block, 2 Way, Pitch 5 mm, 90 Degree Angle, Through-Hole", PartNumber="SCREW-5.0/5.08 2WAYS", Poles=2
Q1_R1 Q1_R2 Q1_R3 Q1_R4 Q1_R5 Q1_R6 Q1_R7 Q1_R8: library part CMP-2000-04985-1, "IRLML2502TRPBF, N-Channel HEXFET(R) Power MOSFET, 20 V VDS, +/- 12 V VGS, 4.2 A, 3-Pin SOT23, RoHS, Tape and Reel", Drain-Source On Resistance-Max=0.045O, Drain-to-Source Voltage [Vdss]=20V, Manufacturer="International Rectifier", Package Description="3-Pin Small Outline Transistor, Body 2.92 x 1.3 mm, Pitch 0.95 mm", Package Reference=SOT-23-3, Rated Power Dissipation=1.25W, Channel Type=N-Channel, Datasheet URL=https://datasheet.ciiva.com/6383/irlml2502pbf-6383216.pdf, Datasheet Version=Apr-14, Manufacturer URL=http://internationalrectifier.com/, Qg Gate Charge=8nC
R1 R2 R3 R4 R5 R6 R7 R8_R1 R8_R2 R8_R3 R8_R4 R8_R5 R8_R6 R8_R7 R8_R8 R9_R1 R9_R2 R9_R3 R9_R4 R9_R5 R9_R6 R9_R7 R9_R8 R10 R11_I1 R11_I2 R11_I3 R11_I4 R11_I5 R11_I6 R11_I7 R11_I8 R12_I1 R12_I2 R12_I3 R12_I4 R12_I5 R12_I6 R12_I7 R12_I8: library part CMP-1013-00624-1, "10K2 0.125W 1% 0805 (2012 Metric)  SMD", Case-EIA=0805, Case-Metric=2012, Power="0.125 W", Tolerance="1 %", Technology=SMT
SW1 SW2 SW3 SW4_R1 SW4_R2 SW4_R3 SW4_R4 SW4_R5 SW4_R6 SW4_R7 SW4_R8: library part CMP-1453-00006-1, "WS-TATV THT Tact Switch 6X6 mm", Manufacturer="Wuerth Elektronik", ComponentLink1Description="Manufacturer URL", ComponentLink1URL=http://www.we-online.com, ComponentLink2Description=Datasheet, ComponentLink2URL=http://katalog.we-online.de/em/datasheet/4301x6.pdf, NoPins=04, PackageReference=430156070736, PartNumber=430156070736
U1: library part CMP-1740-00005-1, "Intelligent Control LED Integrated Light Source, 3.5 to 5.3 V, -25 to 80 degC, 4-Pin SMD, RoHS, Bulk", Case\Package=Radial, Current Rating="240 mA", Max Operating Temperature="125 degC", Min Operating Temperature="-55 degC", Package Quantity=200, Tolerance=10%, ComponentLink1Description="Manufacturer URL", ComponentLink1URL=https://www.adafruit.com/, ComponentLink2Description=Datasheet, ComponentLink2URL=https://cdn-shop.adafruit.com/datasheets/WS2812B.pdf, DatasheetVersion=May-13, Height="12.2 mm", Lead Pitch="5 mm", Length="12.2 mm", Mount="Through Hole", PackageDescription="4-Pin Surface Mount Device, Body 5 x 5 mm, Pitch 3.3 mm", PackageReference=WS2812B, Packaging=Bulk, Pins=2, Radiation Hardening=No, REACH SVHC="No SVHC", RoHSCompliant=true, Shielding=Unshielded
U2: library part CMP-0304-00145-2, "ARM Cortex-M0 32-bit MCU, 32 KB Flash, 6 KB Internal RAM, 15 I/Os, 20-Pin TSSOP, -40 to 85 degC, Tray", I/Os (High Current)=15, Manufacturer=STMicroelectronics, Operating Frequency(F) (Processor speed) (MHz)=48, Package Description="20-Pin Thin Shrink Small Outline Package, Body 6.5 x 4.4 mm, Pitch 0.65 mm", Package Reference=TSSOP20, Supply Voltage(Vcc) min (V)=2.4, ComponentLink1Description="Manufacturer URL", ComponentLink1URL=http://www.st.com/, ComponentLink2Description=Datasheet, ComponentLink2URL=http://www.st.com/st-web-ui/static/active/en/resource/technical/document/datasheet/DM00141386.pdf, Core="ARM Cortex-M0", DatasheetVersion="Rev. 3", FLASH Size (Prog) (kB)=32, Internal RAM Size (kB)=6, Mounting Technology="Surface Mount", Packing=Tray, PartNumber=STM32F070F6P6
U3: library part Component_1, "E10-433MS"
U4: library part CMP-0476-01803-1, "LDO Fixed 3.3V", Dropout Voltage(V)=1.1, Manufacturer="Linear Technology", Output Voltage="5 V", PartNumber=LT1117CST-5#TRPBF, ComponentLink1Description="Manufacturer URL", ComponentLink1URL=http://www.linear.com/, ComponentLink2Description=Datasheet, ComponentLink2URL=http://cds.linear.com/docs/en/datasheet/1117fd.pdf, ComponentLink3Description="Package Specification", ComponentLink3URL=http://cds.linear.com/docs/en/packaging/SOT_3_05-08-1630.pdf, DatasheetVersion="Rev. D", Discrete Pass Element=no, Iout(mA)=800, Isupply(mA)=5, Mounting Technology="Surface Mount", Number of Outputs=1, PackageDescription="3-Pin Plastic SOT-223, 3.505 x 6.505 mm Body, Pitch 2.3 mm", PackageReference=ST-3, PackageVersion=Jun-10, Packing="Tape and Reel", PSRR(dB)=75, RoHS=TRUE, Vin Max(V)=15, Vin Min(V)=2.45
U5 U6: library part CMP-0314-00266-1, "Remote 8-Bit I2C and SMBus Low-Power I/O Expander with Interrupt Output, Reset, and Config Registers, 2.3 to 5.5 V, -40 to 85 degC, 16-pin TSSOP (PW), Green (RoHS & no Sb/Br)", 5V Tolerant I/O=Yes, Manufacturer="Texas Instruments", Max Frequency(kHz)=400, # of I/Os=8, Code_JEDEC=MO-153, ComponentLink1Description=Datasheet, ComponentLink1URL=http://www.ti.com/general/docs/lit/getliterature.tsp?genericPartNumber=PCA9538&fileType=pdf, Configuration Registers=Yes, DatasheetVersion=SCPS126E, Eco-Plan="Green (RoHS & no Sb/Br)", fSCLK(Max)(MHz)="0.1, 0.4", I2C Address="1110 0xx", Interrupt Output=Yes, Low Power=Yes, Mounting Technology="Surface Mount", PackageDescription="16-Pin Plastic Thin Small Outline Package 5 x 4.4 mm Body ,0.65 mm Pitch", PackageReference=PW16, PackageVersion="revG, Feb-2011", PartNumber=PCA9538PW, Push-Pull I/O Type=Yes, Reset Input=Yes, SubFamily="I2C IO Expander", Technology Family="I2C, SMBus", VCC(Max)(V)=5.5, VCC(Min)(V)=2.3, Vcc range(V)="2.3 to 5.5"
U7_I1 U7_I2 U7_I3 U7_I4 U7_I5 U7_I6 U7_I7 U7_I8: library part CMP-2000-06281-1, "Phototransistor Optocoupler, 4 us Rise, 3 us Fall, 5000 Vrms, -55 to 110 degC, 4-Pin MDIP, RoHS, Tape and Reel", Current - DC Forward (If) (Max)=50mA, Current Transfer Ratio (Max)=600%@5mA, Current Transfer Ratio (Min)=300%@5mA, Manufacturer="Fairchild Semiconductor", Operating Temperature=-55°C~110°C, Package / Case=4-SMD,GullWing, Package Description="4-Pin Surface Mount Device, Body 6.5 x 4.6 mm, Pitch 2.54 mm", Package Reference="MDIP 4L", Package Version=10/2014, Standard Package=1, Supplier Device Package=4-SMD, Voltage - Forward (Vf) (Typ)=1.2V, Voltage - Isolation=5000Vrms, Voltage - Output (Max)=70V, Category=Isolators, Current - Output / Channel=50mA, Datasheet URL=https://www.fairchildsemi.com/datasheets/FO/FOD817D.pdf, Datasheet Version="Rev. 2.8, 11/2015", Family=Optoisolators-Transistor,PhotovoltaicOutput, Input Type=DC, Manufacturer URL=https://www.fairchildsemi.com/, Mounting Technology=SurfaceMount, Mounting Type=SurfaceMount, Number of Channels=1, Online Catalog=FOD617,814,817Series, Other Names=FOD817DSDDKR, Output Type=Transistor, Package URL=https://www.fairchildsemi.com/package-drawings/N0/N04C.pdf, Packaging=Digi-Reel®, Rise / Fall Time (Typ)=4µs,3µs, Series=-, Turn On / Turn Off Time (Typ)=-, Vce Saturation (Max)=200mV

## Free pads (board coordinates)
  round 3.3 hole 3.3: 3(106.5,124.5) 4(24.5,124.5) 5(106.5,101.5) 6(24.5,12) 6(24.5,101.5) 6(75,15) 6(75,35.5) 6(75,55.5) 6(75,75.5) 6(75,95.787) 6(106.5,12)

## Via types
v1: diameter 0.8, hole 0.5, Top Layer to Bottom Layer, tented both sides, 140 vias
v2: diameter 0.8, hole 0.4, Top Layer to Bottom Layer, tented both sides, 96 vias
v3: diameter 0.8, hole 0.4, Top Layer to Bottom Layer, 10 vias

## Nets (pads, with @x,y where several pads share a name; then routed paths per layer and width w, separated by ;. In a path a pad name is that pad's centre, name@x,y a point inside that pad or via, vN(x,y) a via of type N, cw(c..) or ccw(c..) an arc to the next point about the centre after c; other vN are vias at no path point)
5V: C4.2 C6.1 C7.2 D2.1 D3_R1.1 D3_R2.1 D3_R3.1 D3_R4.1 D3_R5.1 D3_R6.1 D3_R7.1 D3_R8.1 F1.1 K1_R1.4 K1_R2.4 K1_R3.4 K1_R4.4 K1_R5.4 K1_R6.4 K1_R7.4 K1_R8.4 U1.1 U4.3 | length 55.8
  Top Layer w0.254: 36.8,111.7 39.2,111.7 C7.2@39.3,111.6 39.55,111.85 U1.1@42.25,111.85
  Top Layer w0.3: K1_R8.4@57.977,22.4 60.174,22.4 60.824,23.05 D3_R8.1@60.977,23.05 ; K1_R7.4@57.977,32.5 60.174,32.5 60.824,33.15 D3_R7.1@60.977,33.15 ; K1_R6.4@57.977,42.6 60.174,42.6 60.824,43.25 D3_R6.1@60.977,43.25 ; K1_R5.4@58,52.7 60.197,52.7 60.847,53.35 D3_R5.1@61,53.35 ; K1_R4.4@58,62.8 60.197,62.8 60.847,63.45 D3_R4.1@61,63.45 ; K1_R3.4@58,72.9 60.197,72.9 60.847,73.55 D3_R3.1@61,73.55 ; K1_R2.4@58,82.963 60.197,82.963 60.847,83.613 D3_R2.1@61,83.613 ; K1_R1.4@58,93.1 60.197,93.1 60.848,93.75 D3_R1.1@61,93.75
  Top Layer w1: F1.1@32.8,102.1 D2.1@35.058,102.1 ; D2.1@35.5,102.475 35.567,102.475 35.61,102.518 35.61,102.585 36.8,103.775 36.8,111.7 ; 36.8,122.3 37.4,122.9 U4.3@39.4,122.9 39.6,122.9 40.875,121.625 42.375,121.625 C4.2@42.4,121.6 42.725,121.6 44.775,123.65 C6.1@47.2,123.65
BOOT0: R6.2 SW3.3 U2.1 | length 50.8
  Top Layer w0.254: v2(59.6,123.2) 59.607,123.193 59.607,121.657 U2.1@59.615,121.65 ; v3(68.8,117.863) 72,121.062 v3(72,123.1) ; SW3.3@71.305,103.85 73.217,103.85 R6.2@73.417,104.05
  Bottom Layer w0.254: v2(59.6,123.2) 60.125,122.675 71.427,122.675 71.852,123.1 v3(72,123.1) ; v3(68.8,117.863) 68.8,117.726 68.949,117.577 77.219,117.577 78.977,115.819 78.977,113.023 79,113 79,112.604 77.586,111.191 76.891,111.191 75.5,109.8 75.5,106.321 73.029,103.85 SW3.3@71.305,103.85
GND: C1.1 C2.1 C3.1 C4.1 C5.1 C6.2 C7.1 C8.1 C9.1 D2.2 DS1.2 DS2.2 DS4_R1.2 DS4_R2.2 DS4_R3.2 DS4_R4.2 DS4_R5.2 DS4_R6.2 DS4_R7.2 DS4_R8.2 DS7_I1.2 DS7_I2.2 DS7_I3.2 DS7_I4.2 DS7_I5.2 DS7_I6.2 DS7_I7.2 DS7_I8.2 J1.MP P1.4 P3.2 pad.5 pad.6@24.5,101.5 Q1_R1.2 Q1_R2.2 Q1_R3.2 Q1_R4.2 Q1_R5.2 Q1_R6.2 Q1_R7.2 Q1_R8.2 R6.1 R7.1 SW2.3 U1.3 U2.15 U3.1 U3.12 U4.1 U5.1 U5.2 U5.8 U6.1 U6.8 | length 83.3
  Top Layer w0.254: R7.1@27.4,117.65 27.5,117.55 v2(27.5,116.5) ; D2.2@35.5,99.2 v2(35.5,100) ; v2(38.5,117.4) 38.604,117.504 38.604,117.704 39.2,118.3 U4.1@39.4,118.3 ; C7.1@39.3,109.6 39.477,109.423 v2(39.477,108.5) ; C5.1@42.4,117.2 42.5,117.3 v2(42.5,118.199) ; C4.1@42.4,124.4 43.65,124.4 v2(43.75,124.5) ; v2(48.338,108.55) 48.338,108.51 48.87,107.978 v2(48.87,106.775) ; v2(50.5,108.5) 50.915,108.5 v2(52.165,109.75) ; v2(53.123,124.767) 54.167,124.767 C1.1@54.2,124.8 ; C3.1@55.011,110.75 55.011,110.555 v2(55.75,109.815) ; v2(56.3,114.3) 56.346,114.346 56.346,115.832 U2.15@56.365,115.85 ; v2(56.75,109.75) 56.854,109.854 56.854,110.04 57.565,110.75 C2.1@57.665,110.75 ; DS4_R8.2@64.202,20.662 64.289,20.75 v2(65.65,20.75) ; DS4_R7.2@64.202,30.762 64.214,30.75 v2(65.65,30.75) ; DS4_R6.2@64.202,40.862 64.339,41 v2(65.65,41) ; DS4_R5.2@64.225,50.962 64.263,51 v2(65.75,51) ; DS4_R4.2@64.225,61.062 64.287,61 v2(65.75,61) ; DS4_R3.2@64.225,71.162 64.313,71.25 v2(65.75,71.25) ; DS4_R2.2@64.225,81.225 v2(65.65,81.225) ; DS4_R1.2@64.225,91.362 64.363,91.5 v2(65.75,91.5) ; v2(64.3,107.784) 65.316,107.784 C9.1@65.4,107.7 ; Q1_R8.2@64.612,19.112 64.749,19.25 v2(65.65,19.25) ; Q1_R7.2@64.612,29.213 64.649,29.25 v2(65.65,29.25) ; Q1_R6.2@64.612,39.313 64.799,39.5 v2(65.65,39.5) ; Q1_R5.2@64.635,49.412 64.722,49.5 v2(65.75,49.5) ; Q1_R4.2@64.635,59.512 64.647,59.5 v2(65.75,59.5) ; Q1_R3.2@64.635,69.613 65.568,69.613 v2(65.65,69.695) ; Q1_R2.2@64.635,79.675 64.71,79.75 v2(65.65,79.75) ; Q1_R1.2@64.635,89.813 64.698,89.75 v2(65.65,89.75) ; v2(72.2,114.1) 72.213,114.087 73.538,114.087 U5.8@73.55,114.075 ; R6.1@73.417,102.35 73.467,102.3 v3(74.6,102.3) ; U5.2@73.55,110.175 U5.1@73.55,109.525 73.775,109.525 v2(74.4,108.9) ; v2(76,78.25) 76.008,78.258 76.5,78.258 76.5,79.1 77.227,79.827 77.227,79.927 77.4,80.1 DS7_I7.2@77.5,80.1 ; v2(76,87.5) 76.5,88 76.5,89.2 77.227,89.927 77.227,90.027 77.4,90.2 DS7_I8.2@77.5,90.2 ; v2(76.104,47.5) 76.156,47.5 76.456,47.8 76.456,48.756 77.227,49.527 77.227,49.627 77.4,49.8 DS7_I4.2@77.5,49.8 ; v2(76.104,67.712) 77.5,69.108 DS7_I6.2@77.5,69.95 ; v2(76.156,27) 76.156,28.356 77.227,29.427 77.227,29.527 77.4,29.7 DS7_I2.2@77.5,29.7 ; v2(76.264,58.06) 76.351,58.06 76.5,58.209 76.5,58.9 77.227,59.627 77.227,59.727 77.4,59.9 DS7_I5.2@77.5,59.9 ; v3(76.314,38.75) 76.867,39.302 77.002,39.302 77.4,39.7 DS7_I3.2@77.5,39.7 ; v2(76.5,17.5) 76.456,17.5 76.456,18.456 77.227,19.227 77.227,19.327 77.4,19.5 DS7_I1.2@77.5,19.5 ; DS1.2@79.925,119.3 79.752,119.473 79.752,119.898 79.585,120.065 79.585,123.56 79.992,123.967 79.992,124.882 v2(79.96,124.914) ; U3.1@82.312,125.137 82.349,125.1 v2(83.6,125.1) ; v2(85.7,103.65) 85.8,103.55 C8.1@85.8,102.5 ; U6.1@96.15,102.225 96.162,102.237 97.487,102.237 v2(97.5,102.25) ; U6.8@96.15,106.775 96.162,106.787 97.587,106.787 v2(97.6,106.8)
  Top Layer w0.3: U1.3@47.15,108.55 v2(48.338,108.55) ; U3.1@82.17,124.996 U3.1@82.312,125.137
  Bottom Layer w0.254: v2(48.87,106.775) 48.975,106.775 49,106.8 49,107 v2(50.5,108.5) ; v2(52.165,109.75) 52.23,109.815 v2(55.75,109.815)
  other v1: 100.5,102 102,102 103.5,102 99.75,103.5 101.25,103.5 102.75,103.5 104.25,103.5 100.5,105 102,105 103.5,105 105,105 106.5,105 108,105 99.75,106.5 101.25,106.5 102.75,106.5 104.25,106.5 105.75,106.5 107.25,106.5 100.5,108 102,108 103.5,108 105,108 106.5,108 108,108 99.75,109.5 101.25,109.5 102.75,109.5 104.25,109.5 105.75,109.5 107.25,109.5 100.5,111 102,111 93.75,112.5 95.25,112.5 96.75,112.5 98.25,112.5 99.75,112.5 101.25,112.5 102.75,112.5 87,114 88.5,114 90,114 91.5,114 93,114 94.5,114 96,114 97.5,114 99,114 100.5,114 102,114 103.5,114 105,114 106.5,114 108,114 87.75,115.5 89.25,115.5 90.75,115.5 92.25,115.5 93.75,115.5 95.25,115.5 96.75,115.5 98.25,115.5 87,117 88.5,117 90,117 91.5,117 93,117 94.5,117 96,117 97.5,117 87.75,118.5 89.25,118.5 90.75,118.5 92.25,118.5 93.75,118.5 95.25,118.5 96.75,118.5 98.25,118.5 102.75,118.5 104.25,118.5 105.75,118.5 107.25,118.5 87,120 88.5,120 90,120 91.5,120 93,120 94.5,120 96,120 97.5,120 99,120 100.5,120 102,120 87.75,121.5 89.25,121.5 90.75,121.5 92.25,121.5 93.75,121.5 95.25,121.5 96.75,121.5 98.25,121.5 99.75,121.5 101.25,121.5 102.75,121.5 87,123 88.5,123 90,123 91.5,123 93,123 94.5,123 96,123 97.5,123 99,123 100.5,123 102,123 103.5,123 87.75,124.5 89.25,124.5 90.75,124.5 92.25,124.5 93.75,124.5 95.25,124.5 96.75,124.5 98.25,124.5 99.75,124.5 101.25,124.5 102.75,124.5 87,126 88.5,126 90,126 91.5,126 93,126 94.5,126 96,126 97.5,126 99,126 100.5,126 102,126 103.5,126
GND_24V_ISO: P5_I1.2 P5_I2.2 P5_I3.2 P5_I4.2 P5_I5.2 P5_I6.2 P5_I7.2 P5_I8.2 U7_I1.2 U7_I2.2 U7_I3.2 U7_I4.2 U7_I5.2 U7_I6.2 U7_I7.2 U7_I8.2 | length 71.4
  Top Layer w0.254: U7_I1.2@90.5,21.3 90.5,21.4 91.6,22.5 91.7,22.5 ; U7_I2.2@90.5,31.5 97.7,31.5 P5_I2.2@98.9,32.7 ; U7_I3.2@90.5,41.5 97.7,41.5 P5_I3.2@98.9,42.7 ; U7_I6.2@90.5,71.75 97.7,71.75 P5_I6.2@98.9,72.95 ; U7_I7.2@90.5,81.9 97.7,81.9 P5_I7.2@98.9,83.1
  Top Layer w0.3: U7_I4.2@90.5,51.6 90.5,51.7 91,52.2 91.1,52.2 91.7,52.8 P5_I4.2@98.9,52.8 ; U7_I5.2@90.5,61.7 90.5,61.8 91,62.3 91.1,62.3 91.7,62.9 P5_I5.2@98.9,62.9 ; U7_I8.2@90.5,92 90.5,92.1 91,92.6 91.1,92.6 91.7,93.2 P5_I8.2@98.9,93.2 ; 91.7,22.5 P5_I1.2@98.9,22.5
GPIO0: R2.1 U3.3 | length 2
  Top Layer w0.254: R2.1@80.337,122.675 82.234,122.675 U3.3@82.312,122.597
GPIO1: R1.1 U3.4 | length 2.2
  Top Layer w0.254: R1.1@80.337,120.85 80.542,121.054 82.039,121.054 U3.4@82.312,121.327